# Altium PCB Final_projectPCB.PcbDoc
Units mm, origin at the board's own origin, x right, y up, seen from the top; angles counter-clockwise.
Board outline 58.1 x 37.9 mm, 2 copper layers (Top Layer, Bottom Layer); 22 components, 30 nets, 117 pads, 13 vias.
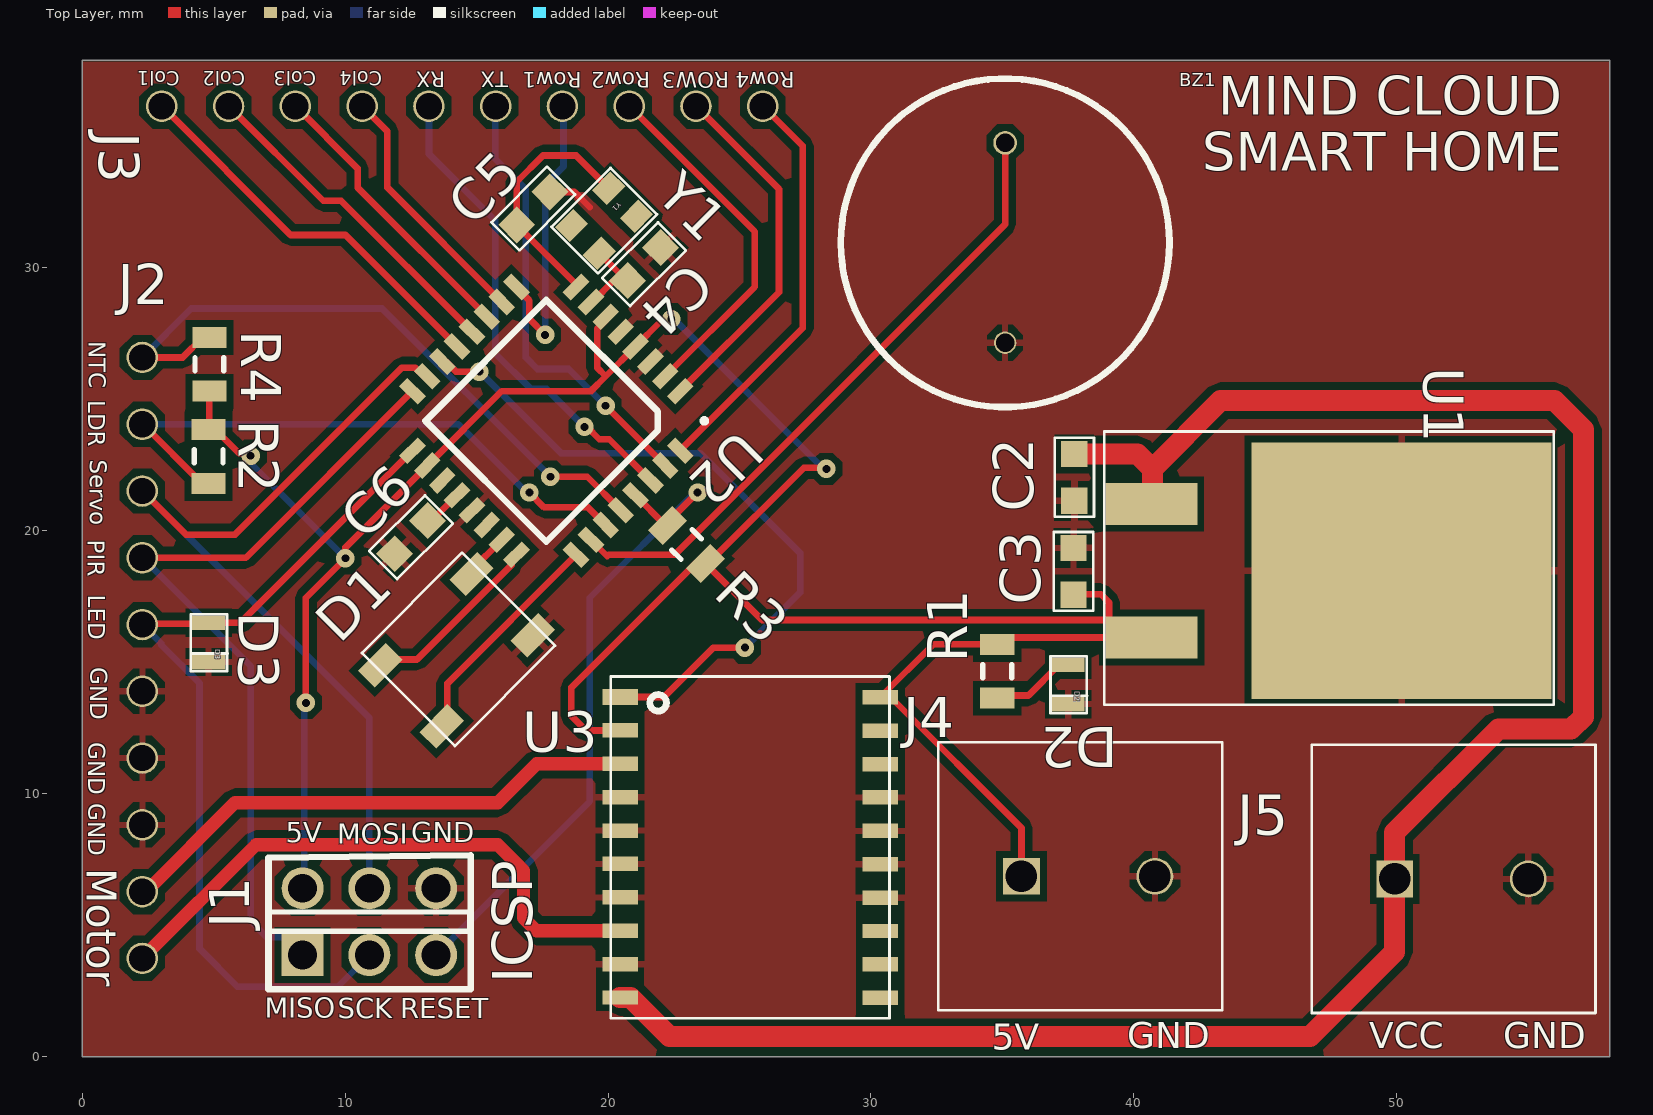
[diagram p0: Top Layer view]
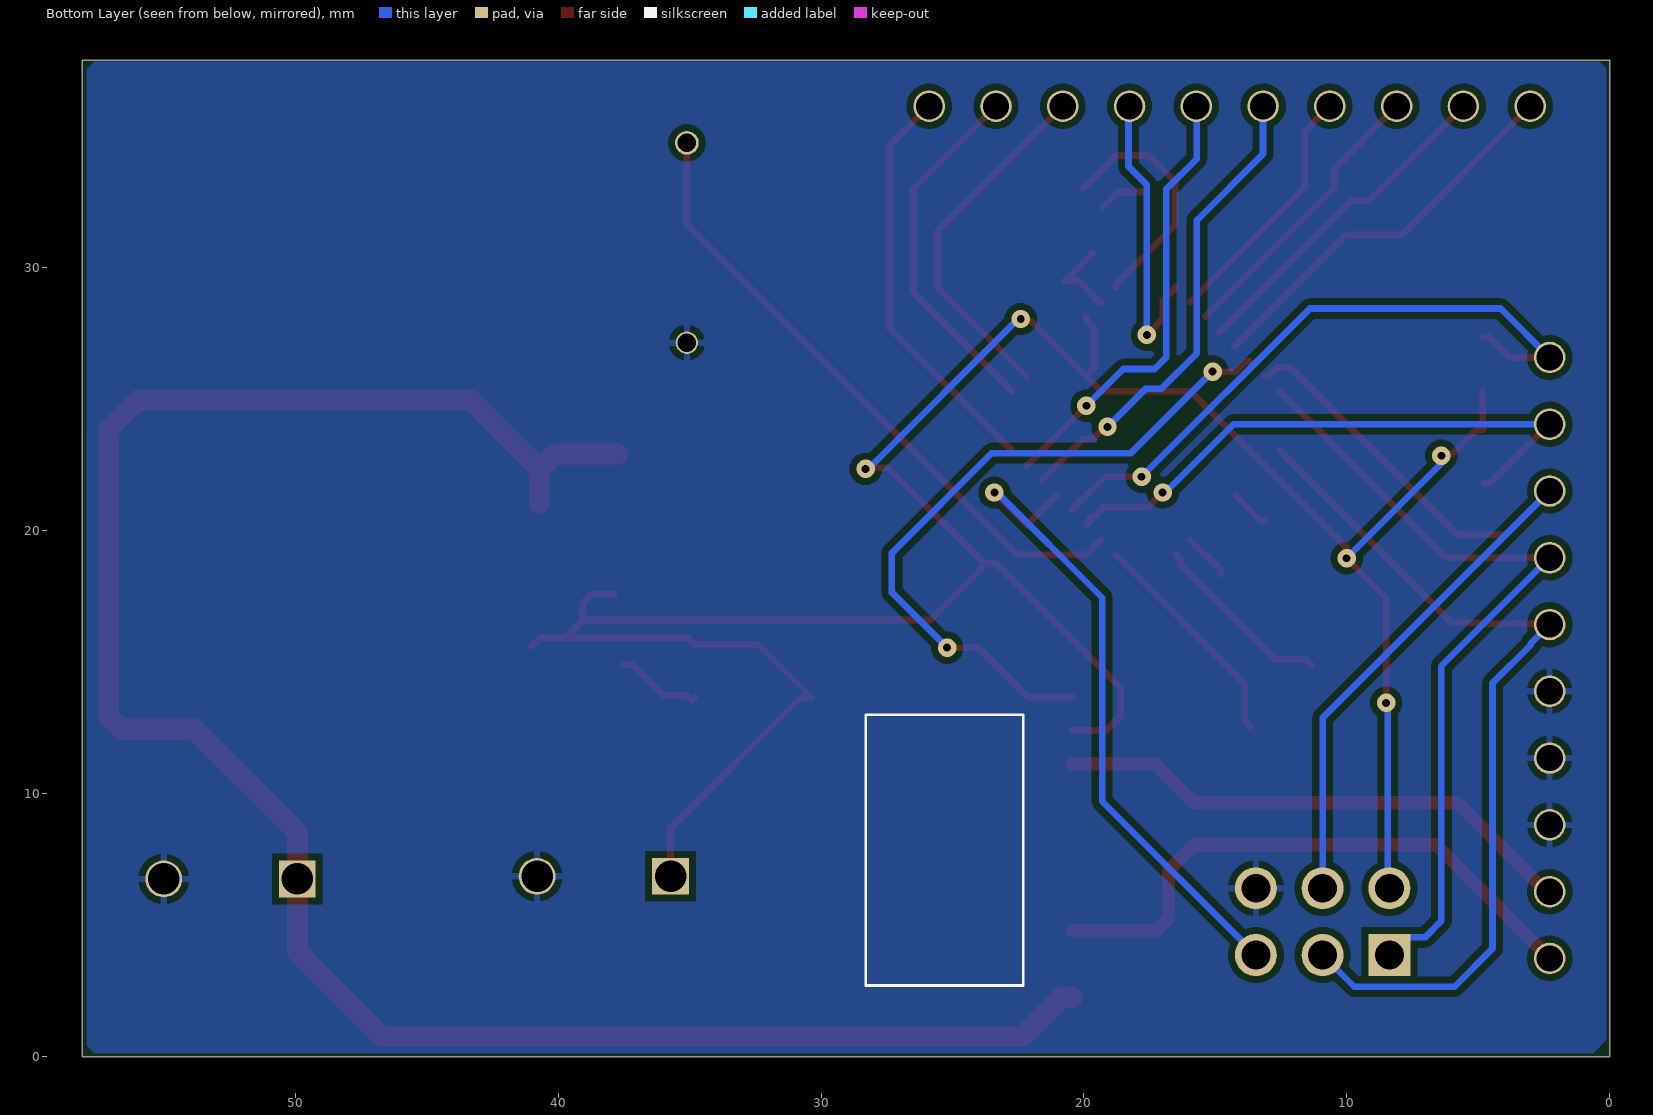
[diagram p1: Bottom Layer view, seen from below]
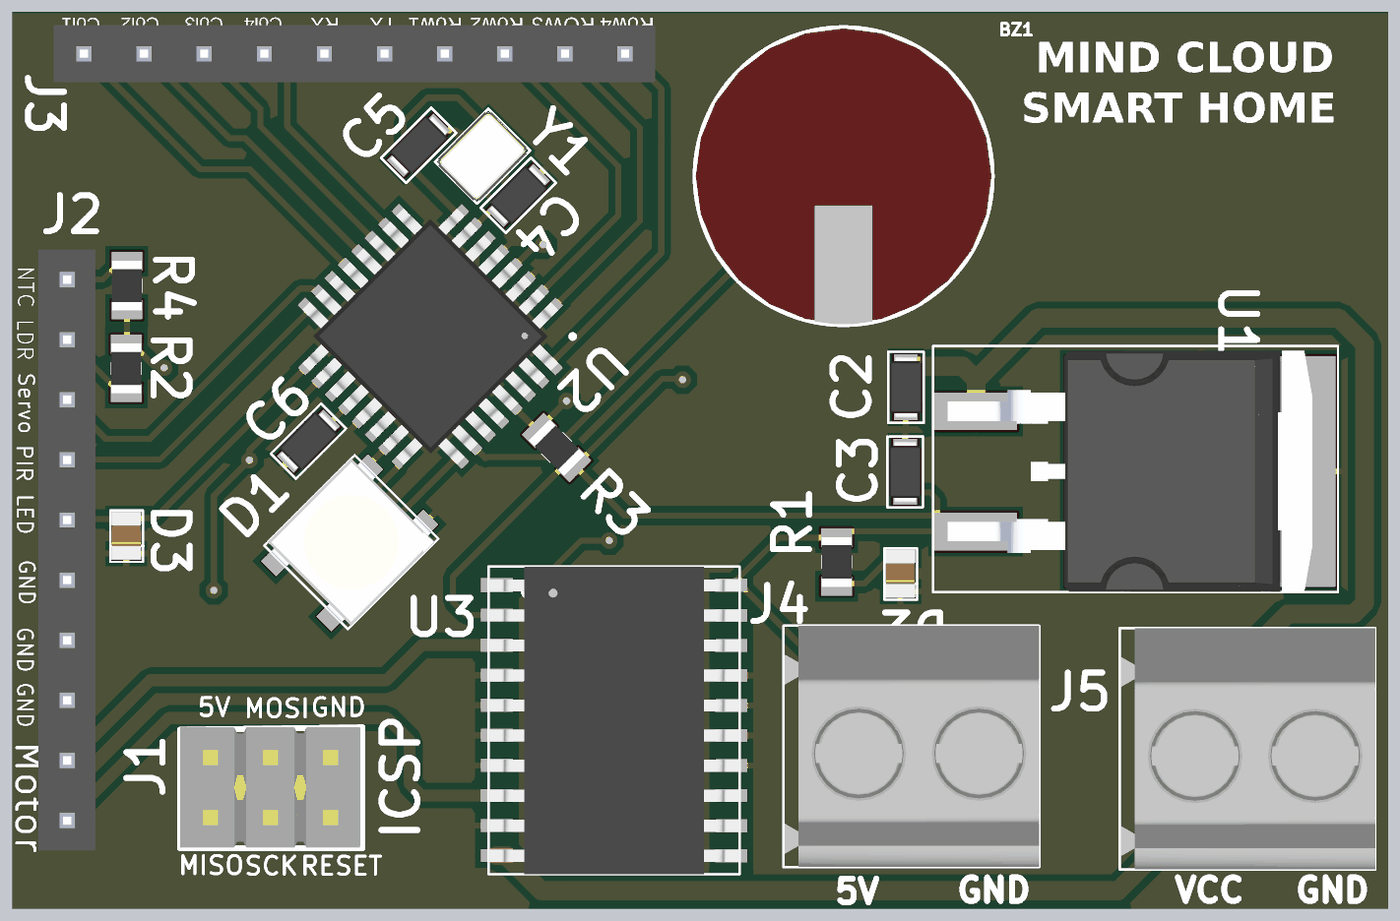
[diagram p2: 3D render of the assembled board from above, using the file's embedded part models]

## Layer stack, top to bottom
Top Solder: solder mask 0.0102, Solder Resist, Dk 3.5
Top Layer: signal copper 0.0356
Dielectric 1: dielectric 0.32, FR-4, Dk 4.8
Bottom Layer: signal copper 0.0356
Bottom Solder: solder mask 0.0102, Solder Resist, Dk 3.5

## Board outline
0,0 58.1,0 58.1,37.9 0,37.9

## Design rules (kind name [scope] priority, off if disabled: settings)
Clearance [All] p1: gap=0.254 ignorepadtopadclearanceinfootprint=FALSE
PolygonConnect [All] p1: connectstyle=Relief reliefconductorwidth=0.254 reliefentries=4 polygonreliefangle="90 Angle" airgapwidth=0.254
RoutingVias [All] p1: holewidth=0.711 width=1.27 viastyle="Through Hole" minholewidth=0.711 minwidth=1.27 maxholewidth=0.711 maxwidth=1.27
SolderMaskExpansion [All] p1: expansion=0.102 istentingtop=FALSE
SupplyNets "Schematic Supply Nets_2" [InNet('VCC')] p1: voltage=0.000
SupplyNets "Schematic Supply Nets_1" [InNet('GND')] p2: voltage=0.000
SupplyNets "Schematic Supply Nets" [InNet('+5')] p3: voltage=0.000
Width Leg2 [InNet('LEG 2')] p1: maxlimit=1 minlimit=0.5 preferedwidth=0.5
Width Leg1 [InNet('LEG 1')] p2: maxlimit=1 minlimit=0.5 preferedwidth=0.5
Width VCC [InNet('VCC')] p3: maxlimit=1 minlimit=0.8 preferedwidth=0.8
Width [All] p4: maxlimit=0.254 minlimit=0.254 preferedwidth=0.254
30 further rules are at their usual default settings.

## Components (designator, comment, footprint, x,y, rotation, side; value= is the part's Value field where it differs from the comment)
BZ1 "Buzzer" Buzzer 35.107,30.956 r0 top
C2 "0.33uF" "Capacitor SMD" 37.738,22.035 r90 top
C3 "0.1uF" "Capacitor SMD" 37.707,18.456 r270 top
C4 "22pF" "Capacitor SMD" 21.371,30.142 r225 top
C5 "22pF" "Capacitor SMD" 17.157,32.263 r225 top
C6 "100nF" "Capacitor SMD" 12.507,19.756 r225 top
D1 "RGB LED" "RGB LED" 13.676,12.558 r45 top
D2 "Red Led" "Red LED" 37.507,14.156 r270 top
D3 "Red Led" "Red LED" 4.807,15.756 r270 top
J1 "3x2 Male" "3x2 Male" 8.382,3.861 r90 top
J2 "" "Female Pinheader10" 2.286,11.354 r0 top
J3 "" "Female Pinheader10" 10.647,36.156 r270 top
J4 "Screw Terminal 2 pins" "Screw Terminal 2 pins" 38.267,6.856 r0 top
J5 "Screw Terminal 2 pins" "Screw Terminal 2 pins" 52.467,6.756 r0 top
R1 "220ohm" R0805 34.807,14.656 r90 top
R2 "1k" R0805 4.807,22.831 r90 top
R3 "1k" R0805 22.987,19.482 r315 top
R4 "10k" R0805 4.834,26.336 r270 top
U1 "Regulator 7805" "Regulator 7805" 50.184,18.479 r0 top
U2 "ATMEGA8A-AU" ATMEGA8A-AU 17.653,24.181 r225 top
U3 "L293DD013TR" L293DD013TR 25.407,7.956 r0 top
Y1 "Crystal 16MHZ" "Crystal 16MHZ" 19.847,31.793 r225 top

## Footprints (in the part's own frame and the unit in brackets; to place one, negate y for a bottom-side part, rotate by r counter-clockwise, add the part's x,y. Pads: shape width x height; smd on the part's side, far side on the other; paste and mask are expansions set on the pad)
"3x2 Male" [mm]
  round 1.6 hole 1.1: 10(2.54,0) 11(2.54,-2.54) 12(2.54,-5.08) 13(0,-5.08) 14(0,-2.54)
  rect 1.6x1.6 hole 1.1: 15(0,0)
  silkscreen extent -1.3,-6.4 3.8,1.3, body extent -1.28,-6.32 3.8,1.3, height 8.38
ATMEGA8A-AU [mm]
  rect 1x0.45 smd mask+0.02: 1(-4.4,2.8) 2(-4.4,2) 3(-4.4,1.2) 4(-4.4,0.4) 5(-4.4,-0.4) 6(-4.4,-1.2) 7(-4.4,-2) 8(-4.4,-2.8) 17(4.4,-2.8) 18(4.4,-2) 19(4.4,-1.2) 20(4.4,-0.4) 21(4.4,0.4) 22(4.4,1.2) 23(4.4,2) 24(4.4,2.8)
  rect 0.45x1 smd mask+0.02: 9(-2.8,-4.4) 10(-2,-4.4) 11(-1.2,-4.4) 12(-0.4,-4.4) 13(0.4,-4.4) 14(1.2,-4.4) 15(2,-4.4) 16(2.8,-4.4) 25(2.8,4.4) 26(2,4.4) 27(1.2,4.4) 28(0.4,4.4) 29(-0.4,4.4) 30(-1.2,4.4) 31(-2,4.4) 32(-2.8,4.4)
  silkscreen extent -4.31,-3.25 3.25,4.31, body extent -4.62,-4.62 4.62,4.62, height 1.2
Buzzer [mm]
  round 0.9 hole 0.7 mask+0.02: 1(0,3.8)
  round 0.85 hole 0.7 mask+0.02: 2(0,-3.8)
  silkscreen extent -6.25,-6.25 6.25,6.25, body extent -6.24,-6.26 6.24,6.25, height 8.52
"Capacitor SMD" [mm] "Molded Capacitor, 2-Leads, Body 2.00x1.25mm, IPC Medium Density_10V 10uF X7R ±20% 0805 Multilayer Ceramic Capacitors MLCC - SMD/SMT ROHS"
  rect 1x1 smd: 1(-0.889,0) 2(0.889,0)
  silkscreen extent -1.5,-0.75 1.5,0.75, body extent -1.32,-0.7 1.32,0.7, height 1.8
"Crystal 16MHZ" [mm]
  rect 1x0.8 smd mask+0.02: 1(-1,-0.75) 3(1,0.75) ""(-1,0.75) ""(1,-0.75)
  silkscreen extent -1.6,-1.25 1.57,1.25, body extent -1.6,-1.25 1.6,1.25, height 0.6
"Female Pinheader10" [mm]
  round 1.2 hole 1 mask+0.02: 1(0,15.24) 2(0,12.7) 3(0,10.16) 4(0,7.62) 5(0,5.08) 6(0,2.54) 7(0,0) 8(0,-2.54) 9(0,-5.08) 10(0,-7.62)
  body extent -1.18,-8.9 1.23,16.5, height 8.39
L293DD013TR [mm]
  rect 1.35x0.6 smd mask+0.02: 1(-4.95,5.72)
  rect 1.35x0.55 smd mask+0.02: 2(-4.95,4.45) 3(-4.95,3.18) 4(-4.95,1.91) 5(-4.95,0.64) 6(-4.95,-0.63) 7(-4.95,-1.9) 8(-4.95,-3.17) 9(-4.95,-4.44) 10(-4.95,-5.71) 11(4.95,-5.72) 12(4.95,-4.45) 13(4.95,-3.18) 14(4.95,-1.91) 15(4.95,-0.64) 16(4.95,0.63) 17(4.95,1.9) 18(4.95,3.17) 19(4.95,4.44) 20(4.95,5.71)
  silkscreen extent -5.3,-6.5 5.3,6.5, body extent -5.32,-6.51 5.33,6.49, height 2.64
R0805 [mm] "Chip Resistor, 2-Leads, Body 2.05x1.25mm, IPC Medium Density"
  rect 0.8x1.3 smd: 1(-1.025,0) 2(1.025,0)
  silkscreen extent -0.25,-0.55 0.25,0.55, body extent -1.05,-0.63 1.05,0.63, height 0.6
"Red LED" [mm]
  rect 0.55x1.25 smd mask+0.05: 1(-0.75,0) 2(0.75,0)
  silkscreen extent -1.07,-0.67 1.1,0.73, body extent -1,-0.62 1,0.62, height 0.81
"Regulator 7805" [mm]
  rect 3.5x1.6 smd mask+0.1: 1(-9.5,2.54) 3(-9.5,-2.54)
  rect 11.4x9.75 smd mask+0.1: 2(0,0)
  silkscreen extent -11.3,-5.1 5.8,5.3, body extent -10.71,-5.1 4.71,5.1, height 4.6
"RGB LED" [mm]
  rect 1.5x0.9 smd mask+0.05: 1(0,3.3) 2(0,0) 3(4.9,0) 4(4.9,3.3)
  silkscreen extent -0.18,-0.88 5.22,4.13, body extent -0.18,-0.88 5.22,4.12, height 1.62
"Screw Terminal 2 pins" [mm]
  rect 1.4x1.4 hole 1.2 mask+0.102: 1(-2.54,0)
  round 1.4 hole 1.2 mask+0.102: 2(2.54,0)
  silkscreen extent -5.7,-5.1 5.1,5.1, body extent -5.66,-5.1 5.1,5.1, height 14.1

## Part data
BZ1: Manufacturer=KINGSTATE, Manufacturer Part Number=KXG1205C, Supplier Part Number=C1122355, Supplier=LCSC
C2 C3 C4 C5 C6: library part "Capacitor SMD", "10V 10uF X7R ±20% 0805 Multilayer Ceramic Capacitors MLCC - SMD/SMT ROHS", Manufacturer="Samwha Capacitor", Manufacturer Part Number=CS2012X7R106M100NRE, Supplier Part Number=C5189822, Supplier=LCSC
D1: Manufacturer=Worldsemi, Manufacturer Part Number=WS2812B-B/W, Supplier Part Number=C114586, Supplier="LSCS ELECTRONICS"
D2 D3: "20mA White Lens 17mcd 639nm Red 170° 1.8V 0603 LED Indication - Discrete ROHS", Manufacturer=Broadcom/AVAGO, Manufacturer Part Number=HSMH-C170, Supplier Part Number=C188731, Supplier="LSCS ELECTRONICS"
J1: library part M22-5320305R, "Headers & Wire Housings 3+3 DIL VRT HDR GOLD 800PC REEL"
J2 J3: library part "Female Pinheader10", "Tin 3A Direct Insert 2.54mm -65℃~+125℃ 2.54mm Single Row Black Phosphor Bronze Plugin,P=2.54mm Pin Headers ROHS", Manufacturer="Amphenol ICC", Manufacturer Part Number=54101-T0600LF, Supplier Part Number=C240305, Supplier="LSCS ELECTRONICS"
J4 J5: "Brass Alloy 1x2P 16A -40℃~+105℃ 300V Blue Tin 12~24 Direct Insert 5.08mm 1 2 Plugin,P=5.08mm Screw Terminal Blocks ROHS", Manufacturer=CUI, Manufacturer Part Number=TB004-508-02BE, Supplier Part Number=C3818636, Supplier="LSCS ELECTRONICS"
R1 R2 R3 R4: library part Resistor, "Carbon Resister 330Ω 250mW ±350ppm/℃ ±5% Plugin,D2.3xL6.5mm Through Hole Resistors ROHS", Manufacturer="CCO(Chian Chia Elec)", Manufacturer Part Number="CF1/4W-330Ω±5% T", Supplier Part Number=C120043, Supplier="LSCS ELECTRONICS"
U1: "62dB@(120Hz) 1.5A Fixed 5V Positive electrode 35V TO-263-2 Voltage Regulators - Linear, Low Drop Out (LDO) Regulators ROHS", Manufacturer=STMicroelectronics, Manufacturer Part Number=L7805CD2T-TR, Supplier Part Number=C15077, Supplier="LSCS ELECTRONICS"
U2: "8KB 1KB FLASH 23 2.7V~5.5V AVR 16MHz TQFP-32(7x7) Microcontrollers (MCU/MPU/SOC) ROHS", Manufacturer="Microchip Tech", Supplier Part Number=C16190, Manufacturer Part Number=ATMEGA8A-AU, Supplier="LSCS ELECTRONICS"
U3: "SOIC-20-300mil Stepper Motor Driver ROHS", Manufacturer=STMicroelectronics, Supplier Part Number=C21610, Manufacturer Part Number=L293DD013TR, Supplier="LSCS ELECTRONICS"
Y1: "4.5V~5.5V ±50ppm 20mA 16MHz CMOS SMD5032-4P Crystal Oscillators ROHS", Manufacturer="Seiko Epson", Manufacturer Part Number=X1G0044710006, Supplier Part Number=C963334, Supplier="LSCS ELECTRONICS"

## Via types
v1: diameter 0.7, hole 0.3, Top Layer to Bottom Layer, tented both sides, 13 vias

## Nets (pads, with @x,y where several pads share a name; then routed paths per layer and width w, separated by ;. In a path a pad name is that pad's centre, name@x,y a point inside that pad or via, vN(x,y) a via of type N, cw(c..) or ccw(c..) an arc to the next point about the centre after c; other vN are vias at no path point)
+5: C3.2 J1.10 J4.1 R1.2 R2.2 R3.2 R4.2 U1.3 U2.4 U2.6 U2.18 U3.2 U3.20 | length 105.3
  Top Layer w0.254: R2.2 5.057,23.856 5.972,22.941 6.322,22.941 v1(6.407,22.856) ; R2.2@4.834,23.932 R4.2 ; v1(8.507,13.456) 8.507,17.456 v1(10.007,18.956) 10.007,19.363 U2.18 15.956,25.312 19.35,25.312 19.916,25.878 ; U2.6 19.916,28.002 19.588,27.674 19.588,26.206 19.916,25.878 ; U3.2 19.157,12.406 18.607,12.956 18.607,14.038 23.326,18.757 R3.2 ; 22.008,27.97 U2.4 19.916,25.878 ; v1(28.307,22.356) 28.265,22.398 27.449,22.398 23.808,18.757 R3.2 ; J4.1 35.727,8.696 30.757,13.666 U3.20 32.372,15.681 R1.2 35.065,15.939 U1.3@39.734,15.939 ; C3.2@37.865,17.59 38.746,17.59 39.061,17.275 39.061,16.612 U1.3@39.067,16.606 ; U1.3@41.007,15.616 U1.3 U1.3@39.734,15.939 ; R3.2 25.863,16.606 U1.3@39.067,16.606 ; U1.3@39.067,16.606 U1.3@39.734,15.939
  Bottom Layer w0.254: v1(6.407,22.856) 6.407,22.556 v1(10.007,18.956) ; J1.10 8.445,6.463 8.445,13.393 v1(8.507,13.456) ; v1(22.407,28.056) 22.507,28.056 28.207,22.356 v1(28.307,22.356)
AREF: C6.1 U2.20 | length 1.5
  Top Layer w0.254: C6.1 13.291,20.384 U2.20
Buzzer: BZ1.1 U2.26 | length 24.3
  Top Layer w0.254: U2.26 19.973,19.032 ; 20.024,19.083 22.534,19.083 35.107,31.656 BZ1.1
"Col 1": J3.10 U2.13 | length 15
  Top Layer w0.254: J3.10 7.927,31.256 10.012,31.256 U2.13
"Col 2": J3.9 U2.12 | length 12.8
  Top Layer w0.254: J3.9 9.167,32.556 9.844,32.556 U2.12
"Col 3": J3.8 U2.11 | length 11
  Top Layer w0.254: J3.8 10.475,33.788 10.475,33.056 U2.11
"Col 4": J3.7 U2.10 | length 9.6
  Top Layer w0.254: J3.7 11.607,35.196 11.607,33.055 U2.10
GND: BZ1.2 C2.1 C3.1 C4.1 C5.1 C6.2 D1.3 D2.2 D3.2 J1.12 J2.6 J2.7 J2.8 J4.2 J5.2 U1.2 U2.3 U2.5 U2.21 U3.4 U3.5 U3.6 U3.7 U3.9 U3.14 U3.15 U3.16 U3.17 | length 1.8
  Top Layer w0.254: C5.1 18.721,32.892 19.304,32.309
LDR: J2.2 R2.1 U2.27 | length 23.1
  Top Layer w0.254: J2.2 2.309,24.054 4.557,21.806 R2.1 ; v1(17.007,21.456) 17.57,20.893 19.244,20.893 U2.27 U2.27@19.721,20.554
  Bottom Layer w0.254: J2.2 14.309,24.054 16.907,21.456 v1(17.007,21.456)
LED/SCK: D3.1 J1.14 J2.5 U2.17 | length 33.8
  Top Layer w0.254: J2.5 2.322,16.47 4.771,16.47 D3.1 6.018,16.506 U2.17
  Bottom Layer w0.254: J2.5 3.007,15.713 3.007,15.656 4.457,14.206 4.457,4.106 5.907,2.656 9.717,2.656 J1.14
"LEG 1": J2.9 U3.3 | length 20.2
  Top Layer w0.5: J2.9 2.425,6.274 5.807,9.656 15.807,9.656 17.287,11.136 U3.3
"LEG 2": J2.10 U3.8 | length 22.4
  Top Layer w0.5: J2.10 6.608,8.056 15.807,8.056 16.782,7.081 16.782,5.281 17.277,4.786 U3.8
Motor: U2.14 U3.1 | length 26.6
  Top Layer w0.254: U2.14 13.832,26.444 14.22,26.056 v1(15.107,26.056) ; U3.1 22.132,13.676 24.012,15.556 v1(25.207,15.556)
  Bottom Layer w0.254: v1(15.107,26.056) 18.207,22.956 23.507,22.956 27.307,19.156 27.307,17.656 v1(25.207,15.556)
NetD2_1: D2.1 R1.1 | length 3.3
  Top Layer w0.254: R1.1 34.907,13.531 35.114,13.738 35.989,13.738 37.157,14.906 D2.1
NTC: J2.1 R4.1 U2.28 | length 25
  Top Layer w0.254: J2.1 3.817,26.594 4.584,27.361 R4.1 ; v1(17.807,22.056) 19.212,22.056 U2.28
  Bottom Layer w0.254: J2.1 4.148,28.456 11.407,28.456 v1(17.807,22.056)
"Pir sensor/MISO": J1.15 J2.4 U2.16 | length 30.9
  Top Layer w0.254: J2.4 6.223,18.974 U2.16
  Bottom Layer w0.254: J2.4 6.407,14.853 6.407,5.156 7.029,4.534 7.709,4.534 J1.15
RESET: J1.13 R3.1 U2.29 | length 25.1
  Top Layer w0.254: U2.29 22.193,20.207 22.193,20.242 v1(23.407,21.456)
  Bottom Layer w0.254: J1.13 19.307,9.706 19.307,17.456 23.307,21.456 v1(23.407,21.456)
"RGB Blue": D1.2 U2.25 | length 8.6
  Top Layer w0.254: D1.2 13.888,12.77 13.888,14.193 U2.25
"RGB Green": D1.1 U2.24 | length 7
  Top Layer w0.254: D1.1 11.554,15.103 12.73,15.103 16.327,18.701 16.327,18.895 U2.24
"RGB RED": D1.4 U2.23 | length 1.8
  Top Layer w0.254: D1.4 14.807,18.506 U2.23
"Row 1": J3.4 U2.9 | length 11.3
  Top Layer w0.254: U2.9 16.522,29.241 17.007,28.756 17.007,28.056 v1(17.607,27.456)
  Bottom Layer w0.254: v1(17.607,27.456) 17.607,33.156 18.307,33.856 18.307,36.116 J3.4
"Row 2": J3.3 U2.2 | length 13.7
  Top Layer w0.254: J3.3 25.582,31.381 25.582,29.281 U2.2
"Row 3": J3.2 U2.1 | length 13.7
  Top Layer w0.254: U2.1 26.507,29.075 26.507,32.996 J3.2
"Row 4": J3.1 U2.32 | length 15.7
  Top Layer w0.254: U2.32 27.407,27.712 27.407,34.636 J3.1
RX: J3.6 U2.30 | length 18.4
  Top Layer w0.254: v1(19.107,23.956) 19.195,23.956 19.668,23.483 20.048,23.483 U2.30
  Bottom Layer w0.254: J3.6 13.187,34.336 15.707,31.816 15.707,26.756 17.064,25.398 17.664,25.398 v1(19.107,23.956)
Servo/MOSI: J1.11 J2.3 U2.15 | length 33
  Top Layer w0.254: J2.3 3.944,19.856 5.807,19.856 12.157,26.206 12.661,26.206 12.989,25.878 U2.15
  Bottom Layer w0.254: J2.3 10.922,12.878 J1.11
TX: J3.5 U2.31 | length 17.1
  Top Layer w0.254: v1(19.907,24.756) U2.31
  Bottom Layer w0.254: J3.5 15.707,36.136 15.707,34.156 16.876,32.987 16.876,26.587 17.307,26.156 18.507,26.156 v1(19.907,24.756)
VCC: C2.2 J5.1 U1.1 U3.10 | length 78.3
  Top Layer w0.8: U3.10 20.857,2.246 22.347,0.756 46.707,0.756 49.927,3.976 J5.1 49.927,8.516 53.867,12.456 56.638,12.456 57.107,12.924 57.107,23.856 56.007,24.956 43.307,24.956 40.707,22.356 ; C2.2 40.139,22.924 40.707,22.356 ; U1.1@40.707,21.042 40.707,22.356
XTAL1: C4.2 U2.7 Y1.3 | length 3.2
  Top Layer w0.254: U2.7 19.408,28.706 20.215,29.513 C4.2@20.712,29.513 ; Y1.3 C4.2@20.712,29.513 ; C4.2 C4.2@20.712,29.513
XTAL2: C5.2 U2.8 Y1.1 | length 9.4
  Top Layer w0.254: U2.8 18.784,29.379 C5.2 16.529,33.278 17.526,34.275 18.788,34.275 20.024,33.039 Y1.1
pads on no net: U2.19 U2.22 U3.11 U3.12 U3.13 U3.18 U3.19 Y1.

## Polygon pours and split planes (outlines as drawn)
GND on Top Layer "GND_L01_P000" (solid, remove dead copper, pour order 0): 0,37.846 58.107,37.846 58.107,0 0,0
GND on Bottom Layer "GND_L02_P002" (solid, pour order 2): 0.127,37.592 0.381,37.846 57.658,37.846 57.938,37.566 57.938,0.407 57.658,0.127 0.635,0.127 0.127,0.635

## Silkscreen, mask and mechanical layers (free items; w line width, h text height)
Top Overlay:
  text "Col2" at 6.207,37.656 h0.9 r180
  text "Col3" at 8.907,37.656 h0.9 r180
  text "Col4" at 11.407,37.656 h0.9 r180
  text "RX" at 13.807,37.656 h1 r180
  text "TX" at 16.207,37.656 h1 r180
  text "Row1" at 19.007,37.656 h1.02 r180
  text "Row2" at 21.607,37.656 h1.02 r180
  text "ROW3" at 24.607,37.656 h1.02 r180
  text "Row4" at 27.107,37.656 h1.02 r180
  text "Col1" at 3.707,37.646 h0.9 r180
  text "MIND CLOUD" at 43.209,35.354 h2.5
  text "SMART HOME" at 42.607,33.224 h2.5
  text "NTC" at 0.254,27.203 h0.64 r270
  text "LDR" at 0.229,24.968 h0.64 r270
  text "Servo" at 0.279,22.708 h0.64 r270
  text "PIR" at 0.203,19.66 h0.64 r270
  text "LED" at 0.229,17.577 h0.64 r270
  text "GND" at 0.305,14.808 h0.64 r270
  text "GND" at 0.229,11.963 h0.64 r270
  text "GND" at 0.229,9.627 h0.64 r270
  text "5V" at 7.747,8.153 h0.76
  text "GND" at 12.522,8.153 h0.76
  text "MOSI" at 9.703,8.103 h0.76
  text "Motor" at 0.178,7.163 h1.14 r270
  text "ICSP" at 17.12,2.794 h1.52 r90
  text "MISO" at 6.934,1.473 h0.76
  text "SCK" at 9.728,1.448 h0.76
  text "RESET" at 12.09,1.448 h0.76
  text "GND" at 39.761,0.31 h1
  text "VCC" at 48.961,0.31 h1
  text "GND" at 54.061,0.31 h1
  text "5V" at 34.608,0.254 h1
Assembly Notes:
  the board outline again, w0.1